# Altium PCB DeskClock1.PcbDoc
Units mil, origin at the board's own origin, x right, y up, seen from the top; angles counter-clockwise.
Board outline 6000 x 4000 mil, 2 copper layers (Top Layer, Bottom Layer); 33 components, 40 nets, 140 pads, 0 vias.
Unrouted connection lines stored in the file: 89.
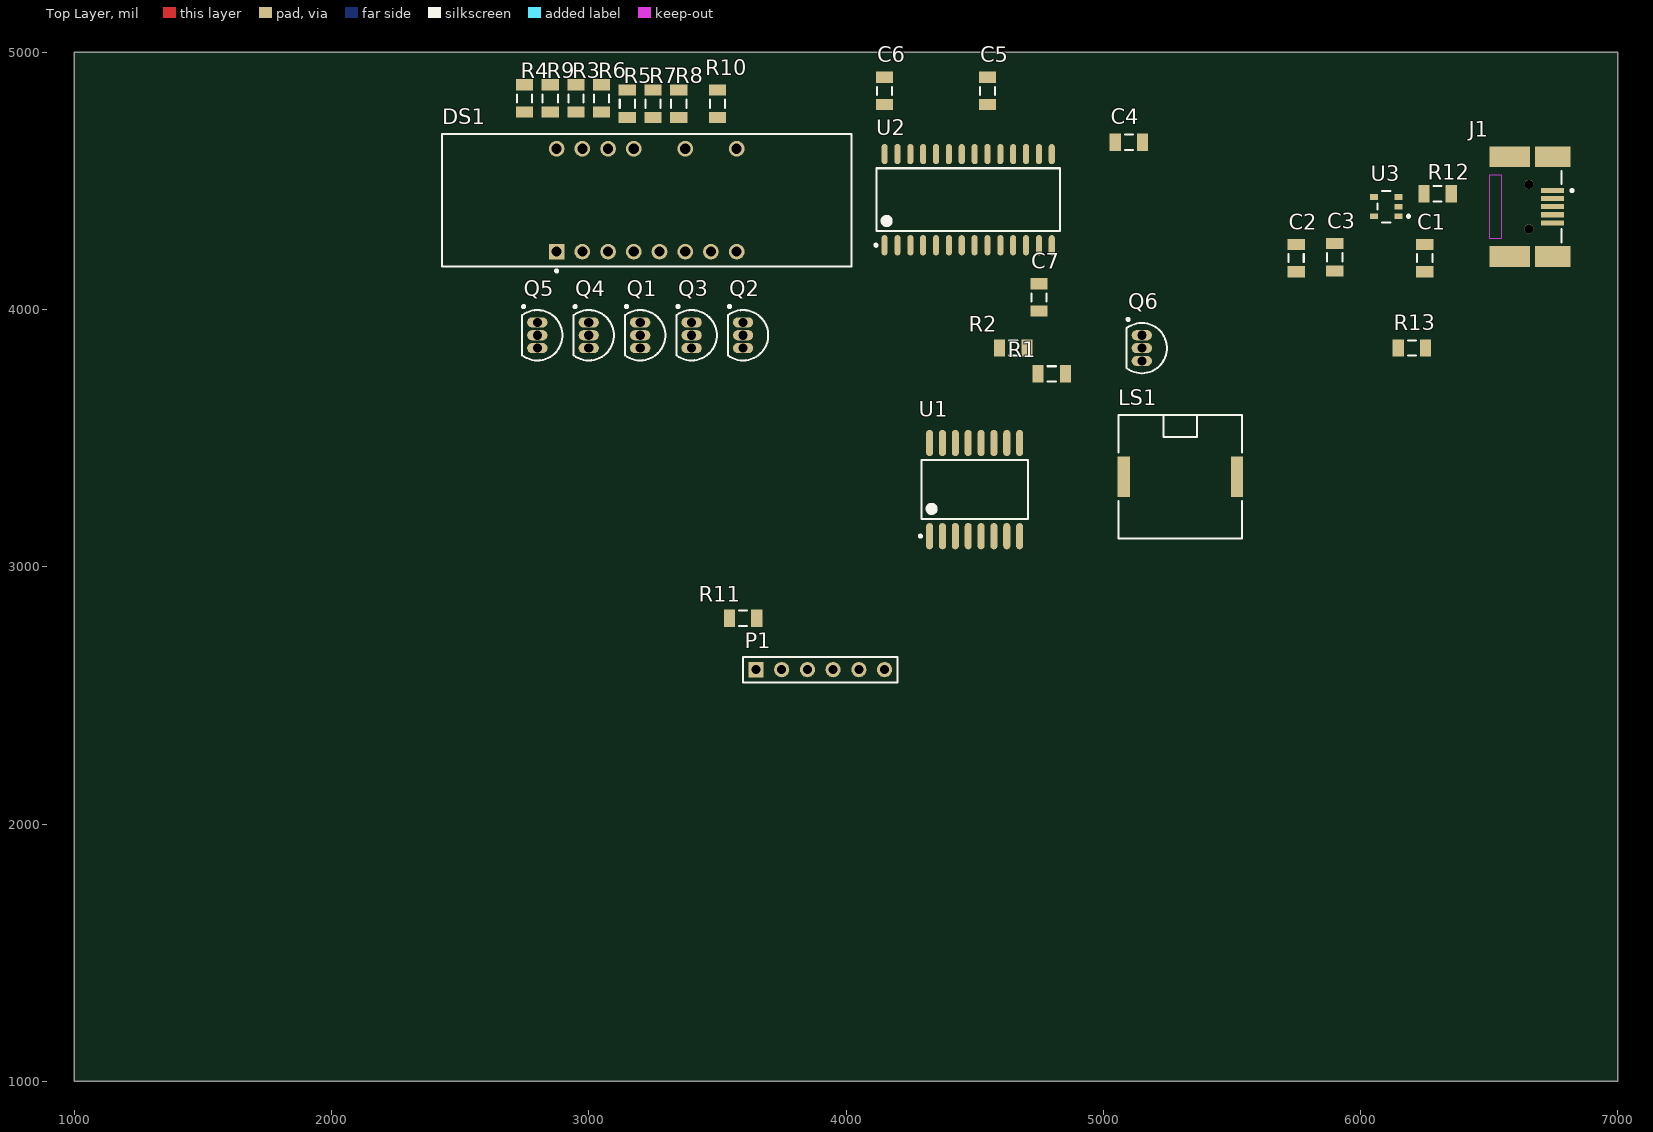
[diagram p0: Top Layer view]
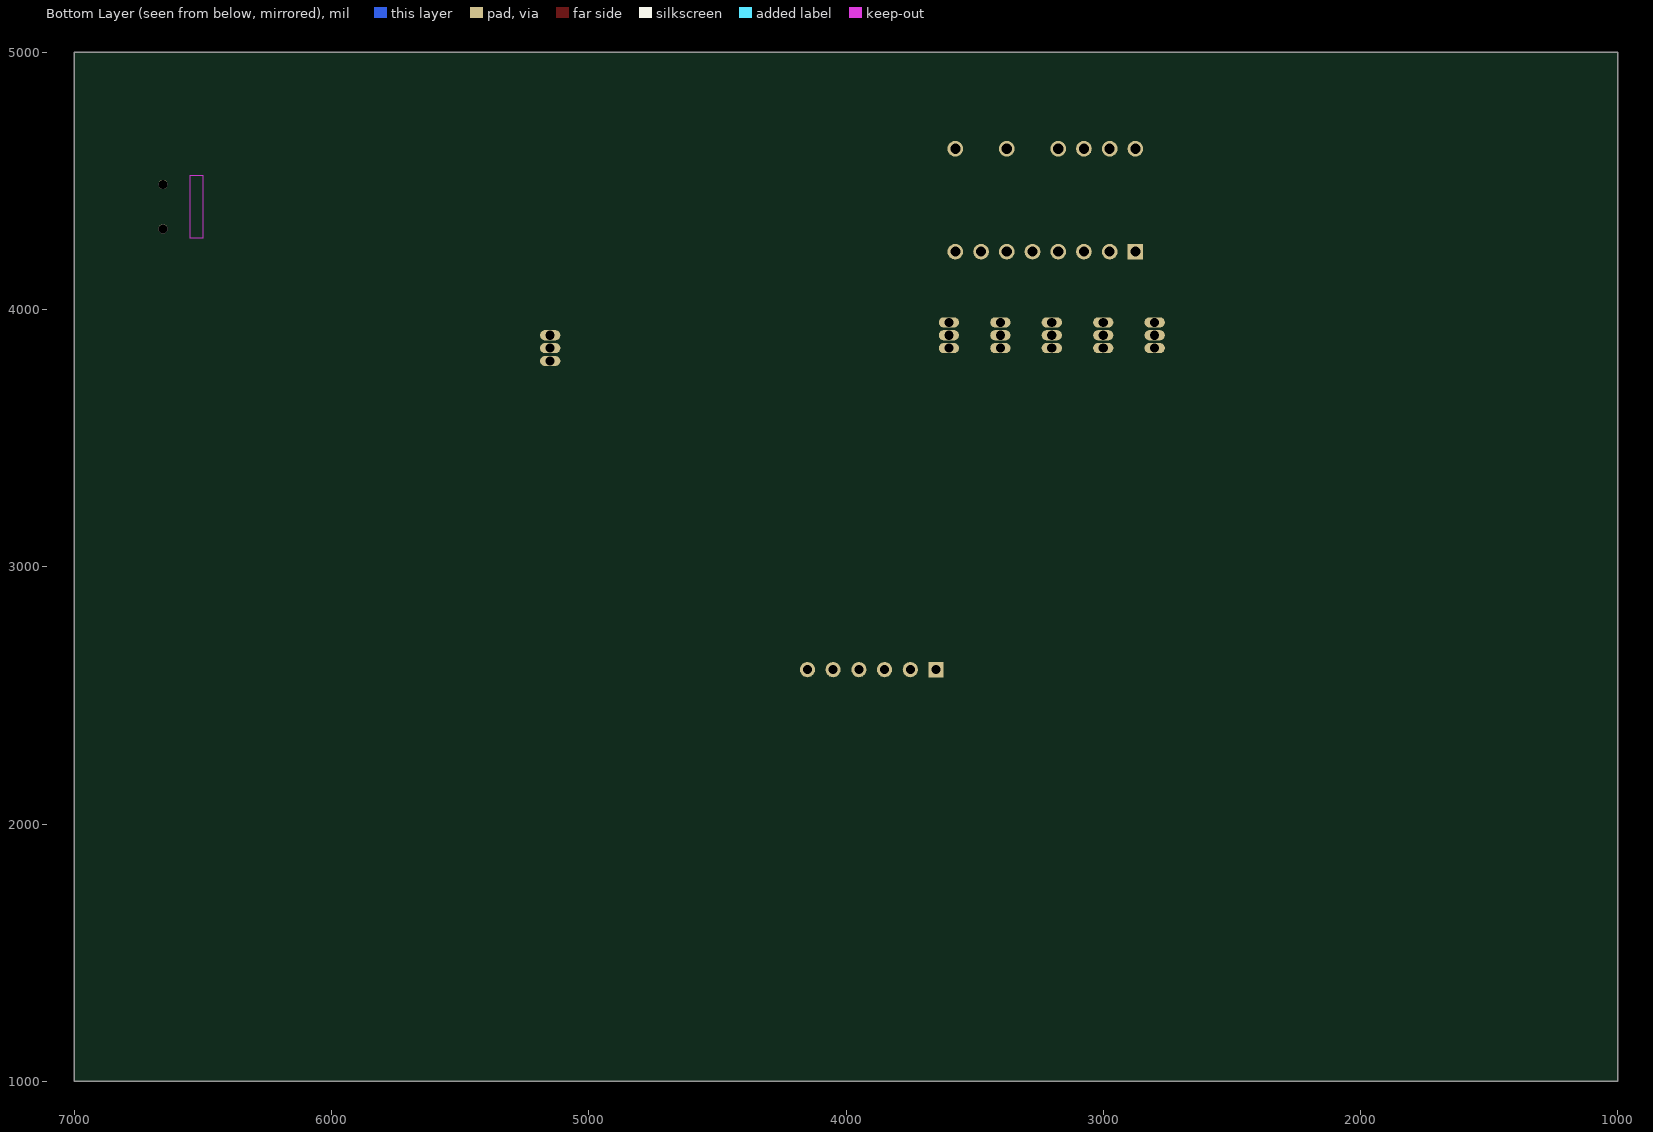
[diagram p1: Bottom Layer view, seen from below]

## Layer stack, top to bottom
Top Solder: solder mask 0.4, Solder Resist, Dk 3.5
Top Layer: signal copper 1.4
Dielectric 1: dielectric 12.6, FR-4, Dk 4.8
Bottom Layer: signal copper 1.4
Bottom Solder: solder mask 0.4, Solder Resist, Dk 3.5

## Board outline
1000,1000 7000,1000 7000,5000 1000,5000

## Design rules (kind name [scope] priority, off if disabled: settings)
Clearance [All] p1: gap=10 ignorepadtopadclearanceinfootprint=FALSE except(0: Arc-Hole Track-Hole SMDPad-Hole THPad-Hole Via-Hole Fill-Hole Poly-Hole Region-Hole Text-Hole)
PolygonConnect [All] p1: connectstyle=Relief reliefconductorwidth=10 reliefentries=4 polygonreliefangle="90 Angle" airgapwidth=10
RoutingVias [All] p1: holewidth=28 width=50 viastyle="Through Hole" minholewidth=28 minwidth=50 maxholewidth=28 maxwidth=50
SolderMaskExpansion [All] p1: expansion=4 istentingtop=FALSE
Width [All] p1: maxlimit=10 minlimit=10 preferedwidth=10
30 further rules are at their usual default settings.

## Components (designator, comment, footprint, x,y, rotation, side; value= is the part's Value field where it differs from the comment)
C1 "Cap Semi" C1206 6250,4200 r90 top value=1.0uF
C2 "Cap Semi" C1206 5750,4200 r90 top value=100pF
C3 "Cap Semi" C1206 5900,4203.15 r90 top value=2.2uF
C4 "Cap Semi" C1206 5100,4650 r0 top value=100pF
C5 "Cap Semi" C1206 4550,4850 r270 top value=10uF
C6 "Cap Semi" C1206 4150,4850 r270 top value=100pF
C7 "Cap Semi" C1206 4750,4046.85 r90 top value=100pF
DS1 "LTC-4627G" FP-LTC-4627G-MFG 3225,4425 r0 top
J1 "678038020" FP-678038020-MFG 6600,4400 r0 top
LS1 "PKLCS1212E2000-R1" FP-PKLCS1212E2000-R1-MFG 5300,3350 r0 top
P1 "Progr" HDR1X6 3650,2600 r0 top
Q1 "2N3904" TO-92A 3200,3900 r180 top
Q2 "2N3904" TO-92A 3600,3900 r180 top
Q3 "2N3904" TO-92A 3400,3900 r180 top
Q4 "2N3904" TO-92A 3000,3900 r180 top
Q5 "2N3904" TO-92A 2800,3900 r180 top
Q6 "2N3904" TO-92A 5150,3850 r180 top
R1 "Res1" C1206 4800,3750 r0 top value=10k
R2 "Res1" C1206 4650,3850 r0 top value=10k
R3 "Res3" C1206 2950,4820.47 r270 top value=1K
R4 "Res3" C1206 2750,4820.47 r270 top value=1K
R5 "Res3" C1206 3150,4800 r270 top value=1K
R6 "Res3" C1206 3050,4820.47 r270 top value=1K
R7 "Res3" C1206 3250,4800 r270 top value=1K
R8 "Res3" C1206 3350,4800 r270 top value=1K
R9 "Res3" C1206 2850,4820.47 r270 top value=1K
R10 "Res3" C1206 3500,4800 r270 top value=1K
R11 "Res3" C1206 3600,2800 r0 top value=1K
R12 "Res3" C1206 6300,4450 r0 top value=1K
R13 "Res3" C1206 6200,3850 r0 top value=1K
U1 "DS3231M+" W16MK+1_M 4500,3300 r90 top
U2 "PIC24FJ64GA002-I/SO" SOIC-SO28_L 4475,4427.17 r90 top
U3 "AP2210K-3.3TRG1" FP-SOT25-MFG 6100,4400 r180 top

## Footprints (in the part's own frame and the unit in brackets; to place one, negate y for a bottom-side part, rotate by r counter-clockwise, add the part's x,y. Pads: shape width x height; smd on the part's side, far side on the other; paste and mask are expansions set on the pad)
C1206 [mm] "Chip Capacitor, Body 3.2x1.6mm, IPC High Density"
  rect 1.1x1.7 smd: 1(-1.35,0) 2(1.35,0)
  silkscreen extent -0.4,-0.75 0.4,0.75, body extent -1.7,-0.9 1.7,0.9, height 1.3
FP-678038020-MFG [mm]
  rect 2.25x0.5 smd paste+0 mask+0: 1(3.725,1.6) 2(3.725,0.8) 3(3.725,0) 4(3.725,-0.8) 5(3.725,-1.6)
  rect 4x2.05 smd paste+0 mask+0: 6(-0.5,4.925) 8(-0.5,-4.925)
  rect 3.5x2.05 smd paste+0 mask+0: 7(3.75,4.925) 9(3.75,-4.925)
  round 0.9 hole 0.9 unplated paste-1000 mask+0: ""(1.4,-2.2) ""(1.4,2.2)
  Keep-Out Layer region: -2.5,-3.1 -1.3,-3.1 -1.3,3.1 -2.5,3.1
  silkscreen extent 4.62,-3.52 5.77,3.52, body extent -4.72,-6.05 5.6,6.05, height 0.25
FP-LTC-4627G-MFG [mm]
  rect 1.55x1.55 hole 1 paste-1000 mask+0: 1(-8.89,-5.08)
  round 1.55 hole 1 paste-1000 mask+0: 2(-6.35,-5.08) 3(-3.81,-5.08) 4(-1.27,-5.08) 5(1.27,-5.08) 6(3.81,-5.08) 7(6.35,-5.08) 8(8.89,-5.08) 9(8.89,5.08) 11(3.81,5.08) 13(-1.27,5.08) 14(-3.81,5.08) 15(-6.35,5.08) 16(-8.89,5.08)
  silkscreen extent -20.21,-7.1 20.21,6.53, body extent -20.31,-6.63 20.31,6.63, height 0.25
FP-PKLCS1212E2000-R1-MFG [mm]
  rect 1.2x4 smd paste+0 mask+0: 1(-5.6,0) 2(5.6,0)
  silkscreen extent -6.1,-6.1 6.1,6.1, body extent -6.3,-6.2 6.3,6.2, height 0.25
FP-SOT25-MFG [mm]
  rect 0.8x0.55 smd paste+0 mask+0: 1(-1.2,0.95) 2(-1.2,0) 3(-1.2,-0.95) 4(1.2,-0.95) 5(1.2,0.95)
  silkscreen extent -2.33,-1.55 0.85,1.55, body extent -1.7,-1.65 1.7,1.65, height 0.25
HDR1X6 [mm] "Connector; Header; 6 Position"
  rect 1.5x1.5 hole 0.9: 1(0,0)
  round 1.5 hole 0.9: 2(2.54,0) 3(5.08,0) 4(7.62,0) 5(10.16,0) 6(12.7,0)
  silkscreen extent -1.27,-1.27 13.97,1.27
SOIC-SO28_L [mm] "SOIC, 28-Leads, Body 17.9x7.5mm, Pitch 1.27mm, IPC High Density"
  oval 2x0.6 smd: 1(-4.5,8.255) 2(-4.5,6.985) 3(-4.5,5.715) 4(-4.5,4.445) 5(-4.5,3.175) 6(-4.5,1.905) 7(-4.5,0.635) 8(-4.5,-0.635) 9(-4.5,-1.905) 10(-4.5,-3.175) 11(-4.5,-4.445) 12(-4.5,-5.715) 13(-4.5,-6.985) 14(-4.5,-8.255) 15(4.5,-8.255) 16(4.5,-6.985) 17(4.5,-5.715) 18(4.5,-4.445) 19(4.5,-3.175) 20(4.5,-1.905) 21(4.5,-0.635) 22(4.5,0.635) 23(4.5,1.905) 24(4.5,3.175) 25(4.5,4.445) 26(4.5,5.715) 27(4.5,6.985) 28(4.5,8.255)
  silkscreen extent -4.62,-9.05 3.1,9.23, body extent -3.8,-9.05 3.8,9.05, height 2.65
TO-92A [mm] "TO, Flat Index; 3 In-Line, Axial Leads; Body Dia. 4.5mm; Leads 0.51 x 0.48 mm (max)"
  oval 2x1 hole 0.9: 1(0,-1.27) 2(0,0) 3(0,1.27)
  silkscreen extent -2.48,-2.95 1.5,2.48, body extent -2.48,-2.5 1.5,2.5, height 6.86
W16MK+1_M [mm] "SOIC, 16-Leads, Body 10.3x7.5mm, Pitch 1.27mm, IPC Low Density"
  oval 2.6x0.7 smd: 1(-4.6,4.445) 2(-4.6,3.175) 3(-4.6,1.905) 4(-4.6,0.635) 5(-4.6,-0.635) 6(-4.6,-1.905) 7(-4.6,-3.175) 8(-4.6,-4.445) 9(4.6,-4.445) 10(4.6,-3.175) 11(4.6,-1.905) 12(4.6,-0.635) 13(4.6,0.635) 14(4.6,1.905) 15(4.6,3.175) 16(4.6,4.445)
  silkscreen extent -4.72,-5.25 2.9,5.47, body extent -3.8,-5.25 3.8,5.25, height 2.65

## Part data
C1 C2 C3 C4 C5 C6 C7: "Capacitor (Semiconductor SIM Model)", LatestRevisionDate=29-May-2009, LatestRevisionNote="IPC-7351 Footprint Added.", PackageDescription="Chip Capacitor", PackageReference=C1206, Published=8-Jun-2000, Publisher="Altium Limited"
DS1: library part CMP-22013-000003-1, "LED 7-SEG 4DIGIT GRN 0.4\" CA", Forward Current=20mA, Forward Voltage=2.1V, Manufacturer=Lite-On, Package=0, Power Dissipation=75mW, Reverse Voltage=5V, Temperature="-35°C to +85°C", Temperature Range High=+85°C, Temperature Range Low=-35°C, Automotive=No, Category=Disp, ComponentLink2Description=Datasheet, ComponentLink2URL=https://datasheet.ciiva.com/15136/getdatasheetpartid-630597-15136600.pdf, Device Class L1=Optoelectronics, Device Class L2=Displays, Device Class L3="LED Displays", Digikey Description="LED 7-SEG 4DIGIT GRN 0.4\" CA", Display Type=LED, Element Config="Common Anode", Height=7.25mm, Lead Free=Yes, Luminous Intensity=2.2mcd, Manufacturer Part Number=LTC-4627G, Mouser Description="LED Displays & Accessories 4 Digit, Green", Octopart=https://octopart.com/ltc-4627g-lite-on-8442722, RoHS=TRUE, Test Current=20mA, Wavelength=569nm
J1: library part CMP-04767-000002-1, "CONN RCPT USB2.0 MINI AB SMD R/A", Ambient Temperature Range High=+50°C, Ambient Temperature Range Low=0°C, Current Rating=1A, Manufacturer=Molex, Package=0, Temperature="0°C to +50°C", Voltage Rating=30V, Automotive=No, Category=Conn, ComponentLink2Description=Datasheet, ComponentLink2URL=https://www.molex.com/webdocs/datasheets/pdf/en-us/0678038020_IO_CONNECTORS.pdf, Conn Orientation="Right Angle", Contact Material=Gold,Nickel, Device Class L1=Connectors, Device Class L2="USB Connectors", Device Class L3=unset, Digikey Description="CONN RCPT USB2.0 MINI AB SMD R/A", Footprint Url=https://www.molex.com/pdm_docs/sd/678038020_sd.pdf, Height=4.1mm, Is Female=yes, Lead Free=Yes, Manufacturer Part Number=678038020, Mouser Description="Conn Mini-USB Type AB RCP 5 POS 0.8mm Solder RA SMD 5 Terminal 1 Port Embossed T/R", Number Of Contacts=5, Octopart=https://octopart.com/67803-8020-molex-7136109, Pitch=0.8mm, RoHS=TRUE, Shielding=true, Temperature Range High=+50°C, Temperature Range Low=0°C, Usb Standard="USB 2.0"
LS1: library part CMP-06202-000001-1, "AUDIO PIEZO TRANSDUCER 12.5V SMD", Frequency=2kHz, Manufacturer=Murata, Operating Supply Voltage=12.5V, Temperature="-20°C to +70°C", Temperature Range High=+70°C, Temperature Range Low=-20°C, Automotive=No, Category=Speak, ComponentLink2Description=Datasheet, ComponentLink2URL=https://www.murata.com/en-global/products/productdata/8801054425118/SPEC-PKLCS1212E2000-R1.pdf?1517839212000, Device Class L1=Electromechanical, Device Class L2="Audio Products", Device Class L3=Buzzers, Digikey Description="AUDIO PIEZO TRANSDUCER 12.5V SMD", Height=3mm, Lead Free=Yes, Manufacturer Part Number=PKLCS1212E2000-R1, Mouser Description="Piezo buzzer SMD", Octopart=https://octopart.com/pklcs1212e2000-r1-murata-7123179, Package=PKLCS1212E2000-R1, RoHS=TRUE
P1: library part "Header 6", "Header, 6-Pin", LatestRevisionDate=17-Jul-2002, LatestRevisionNote="Re-released for DXP Platform.", Publisher="Altium Limited"
Q1 Q2 Q3 Q4 Q5 Q6: "NPN General Purpose Amplifier", ComponentLink1Description="Manufacturer Link", ComponentLink1URL=http://www.fairchildsemi.com/, ComponentLink2Description=Datasheet, ComponentLink2URL=http://www.fairchildsemi.com/ds/2N%2F2N3904.pdf, DatasheetVersion=1997, LatestRevisionDate=15-Jan-2003, LatestRevisionNote="PCB Footprint 'BCY-W3/D4.7' replaced", PackageDescription="TO, Flat Index; 3 In-Line, Axial Leads; Body Dia. 4.5mm; Leads 0.51 x 0.48 mm (max)", PackageReference=TO-92A, PackageVersion=Sep-1998, Published=8-Jun-2000, Publisher="Altium Limited"
R1 R2 R3 R4 R5 R6 R7 R8 R9 R10 R11 R12 R13: "Resistor", Published=8-Jun-2000, Publisher="Altium Limited"
  R1 R2: LatestRevisionDate=17-Jul-2002, LatestRevisionNote="Re-released for DXP Platform.", PackageDescription="Axial Device, Thru-Hole; 2 Leads; 0.3 in Pin Spacing", PackageReference=AXIAL-0.3
  R3 R4 R5 R6 R7 R8 R9 R10 R11 R12 R13: LatestRevisionDate=29-May-2009, LatestRevisionNote="IPC-7351 Footprint Added.", PackageDescription="Chip Resistor", PackageReference=J1-0603
U1: library part CMP-0254-00003-2, "+/-5ppm, MEMS based Real-Time Clock, I2C Interface, 16-Pin SO, -40 to 85 degC, Pb-Free", Code_IPC=SOIC127P1030-16, Code_JEDEC=MS-013-AA, ComponentLink1Description="Manufacturer URL", ComponentLink1URL=http://www.maxim-ic.com, ComponentLink2Description=Datasheet, ComponentLink2URL=http://datasheets.maxim-ic.com/en/ds/DS3231M.pdf, ComponentLink3Description="Package Specification", ComponentLink3URL=http://pdfserv.maxim-ic.com/package_dwgs/21-0042.PDF, DatasheetVersion="Rev 3, Dec-2011", PackageDescription="16-Pin Small-Outline IC, Wide (0.3in), 1.27 mm Pitch, SOIC (W), Pb-Free", PackageReference=W16MK+1, PackageVersion="revD, 2010"
U2: library part CMP-0046-00229-2, "General Purpose 16-Bit Flash Microcontroller, 64KB Flash, 8KB SRAM, 28-Pin SOIC, Industrial Temperature", Code_JEDEC=MS-013, ComponentLink1Description=Datasheet, ComponentLink1URL=http://ww1.microchip.com/downloads/en/DeviceDoc/39881D.pdf, ComponentLink2Description="Packaging Specification", ComponentLink2URL=http://www.microchip.com/stellent/groups/techpub_sg/documents/packagingspec/en012702.pdf, ComponentLink3Description="Microchip.com Home", ComponentLink3URL=http://www.microchip.com/, DatasheetVersion="revD, Feb-2010", PackageDescription="28-Lead Plastic Small Outline (SO) - Wide 7.50mm Body [SOIC]", PackageReference=SOIC-SO28, PackageVersion="revBB, Aug-2009", RevisionNote="Component URLs added."
U3: library part CMP-12756-000023-1, "IC REG LINEAR 3.3V 300MA SOT23-5", Dropout Voltage=250mV, Manufacturer=Diodes, Max Junction Temp=+125°C, Max Supply Voltage=13.2V, Min Supply Voltage=2.5V, Nominal Supply Current=0.01uA, Output Current=300mA, Output Voltage=3.3V, Package=SOT25, Temperature="-40°C to +85°C", Temperature Range High=+85°C, Temperature Range Low=-40°C, Accuracy Percentage=1%, Automotive=No, Category=IC, ComponentLink2Description=Datasheet, ComponentLink2URL=https://www.diodes.com/assets/Datasheets/AP2210.pdf, Device Class L1="Integrated Circuits (ICs)", Device Class L2="Power Management ICs", Device Class L3="Voltage Regulators - Linear", Digikey Description="IC REG LINEAR 3.3V 300MA SOT23-5", Footprint Url=https://www.diodes.com/assets/Package-Files/SOT25.pdf, Height=1.4mm, Lead Free=Yes, Manufacturer Part Number=AP2210K-3.3TRG1, Mouser Description="LDO Voltage Regulators 300mA CMOS LDO 3.3V 250mV", Number Of Outputs=1, Octopart=https://octopart.com/ap2210k-3.3trg1-diodes+inc.-30954630, Output Type=Fixed, RoHS=TRUE, Standoff Height=0.013mm

## Nets (pads, with @x,y where several pads share a name; then routed paths per layer and width w, separated by ;. In a path a pad name is that pad's centre, name@x,y a point inside that pad or via, vN(x,y) a via of type N, cw(c..) or ccw(c..) an arc to the next point about the centre after c; other vN are vias at no path point)
+3.3: C3.2 C4.2 C6.2 C7.2 P1.2 R1.2 R2.2 R11.2 U1.2 U2.13 U2.28 U3.5
+5: C1.2 J1.1 LS1.1 Q1.3 Q2.3 Q3.3 Q4.3 Q5.3 R12.1 U3.1 U3.3
BUZZ: R13.1 U2.23
GND: C1.1 C2.1 C3.1 C4.1 C5.1 C6.1 C7.1 J1.5 J1.6 J1.7 J1.8 J1.9 P1.3 Q6.1 U1.5 U1.6 U1.7 U1.8 U1.9 U1.10 U1.11 U1.12 U1.13 U1.14 U2.8 U2.19 U2.27 U3.2
NetC2_2: C2.2 U3.4
NetC5_2: C5.2 U2.20
NetDS1_1: DS1.1 Q5.1
NetDS1_2: DS1.2 Q4.1
NetDS1_3: DS1.3 R6.2
NetDS1_4: DS1.4 Q1.1
NetDS1_5: DS1.5 R7.2
NetDS1_6: DS1.6 Q3.1
NetDS1_7: DS1.7 R10.2
NetDS1_8: DS1.8 Q2.1
NetDS1_11: DS1.11 R8.2
NetDS1_13: DS1.13 R5.2
NetDS1_14: DS1.14 R3.2
NetDS1_15: DS1.15 R9.2
NetDS1_16: DS1.16 R4.2
NetLS1_2: LS1.2 Q6.3 R12.2
NetP1_1: P1.1 R11.1 U2.1
NetP1_4: P1.4 U2.4
NetP1_5: P1.5 U2.5
NetQ6_2: Q6.2 R13.2
NetR1_1: R1.1 U1.16 U2.17
NetR2_1: R2.1 U1.15 U2.18
NetR3_1: R3.1 U2.6
NetR4_1: R4.1 U2.7
NetR5_1: R5.1 U2.11
NetR6_1: R6.1 U2.14
NetR7_1: R7.1 U2.15
NetR8_1: R8.1 U2.16
NetR9_1: R9.1 U2.21
NetR10_1: R10.1 U2.22
RA0: Q5.2 U2.2
RA1: Q4.2 U2.3
RA2: Q1.2 U2.9
RA3: Q3.2 U2.10
RA4: Q2.2 U2.12
TMR_INT: U1.3 U2.26
pads on no net: DS1.9 J1. J1.2 J1.3 J1.4 P1.6 U1.1 U1.4 U2.24 U2.25